# EAGLE board IJ_1U20HP_board (EAGLE 6.6.0)

Size 100.7 x 22.7 mm. Coordinates in mm from the lower left corner, seen from the top.
Outline: 0,0 0,22.7 100.7,22.7 100.7,0 0,0
Copper layers (1*16): Top 0.035mm / dielectric 1.5mm / Bottom 0.035mm
Design rules "PatternAgents_7mil": minimum track width 7mil, minimum drill 14mil, track to track 7mil, track to pad 7mil, pad to pad 7mil, via to via 7mil, smd to smd 7mil, copper to edge 7mil, drill to drill 7mil, minimum pad ring 12mil, minimum via ring 10mil, stop-mask expansion 4mil, vias tented up to drill 25mil, thermal gap 7mil
Holes 3.2 mm at 7.2,28.15 7.2,-5.5 7.7,28.15 7.7,-5.5 6.7,28.15 6.7,-5.5 93.5,28.15 93.5,-5.5 92.9,28.15 94.1,28.15 94.1,-5.5 92.9,-5.5

## Placement (x,y rotation side)
U$48  BY_CC_SA_TEXTTEXT  [BY_CC_SA_TEXT]  20.78,-16.12 0 top  (outside the outline)

## Library data of the parts
U$48 = PatternAgents-Logos

## Text on the board
tDocu: Tom Moxon